# Altium PCB KUOZHAN.PCBDOC (part 17 of 21)
Units mm, origin at the board's own origin, x right, y up, seen from the top; angles counter-clockwise.
Board outline 165.51 x 116.38 mm, 2 copper layers (Top Layer, Bottom Layer); 171 components, 245 nets, 894 pads, 298 vias.
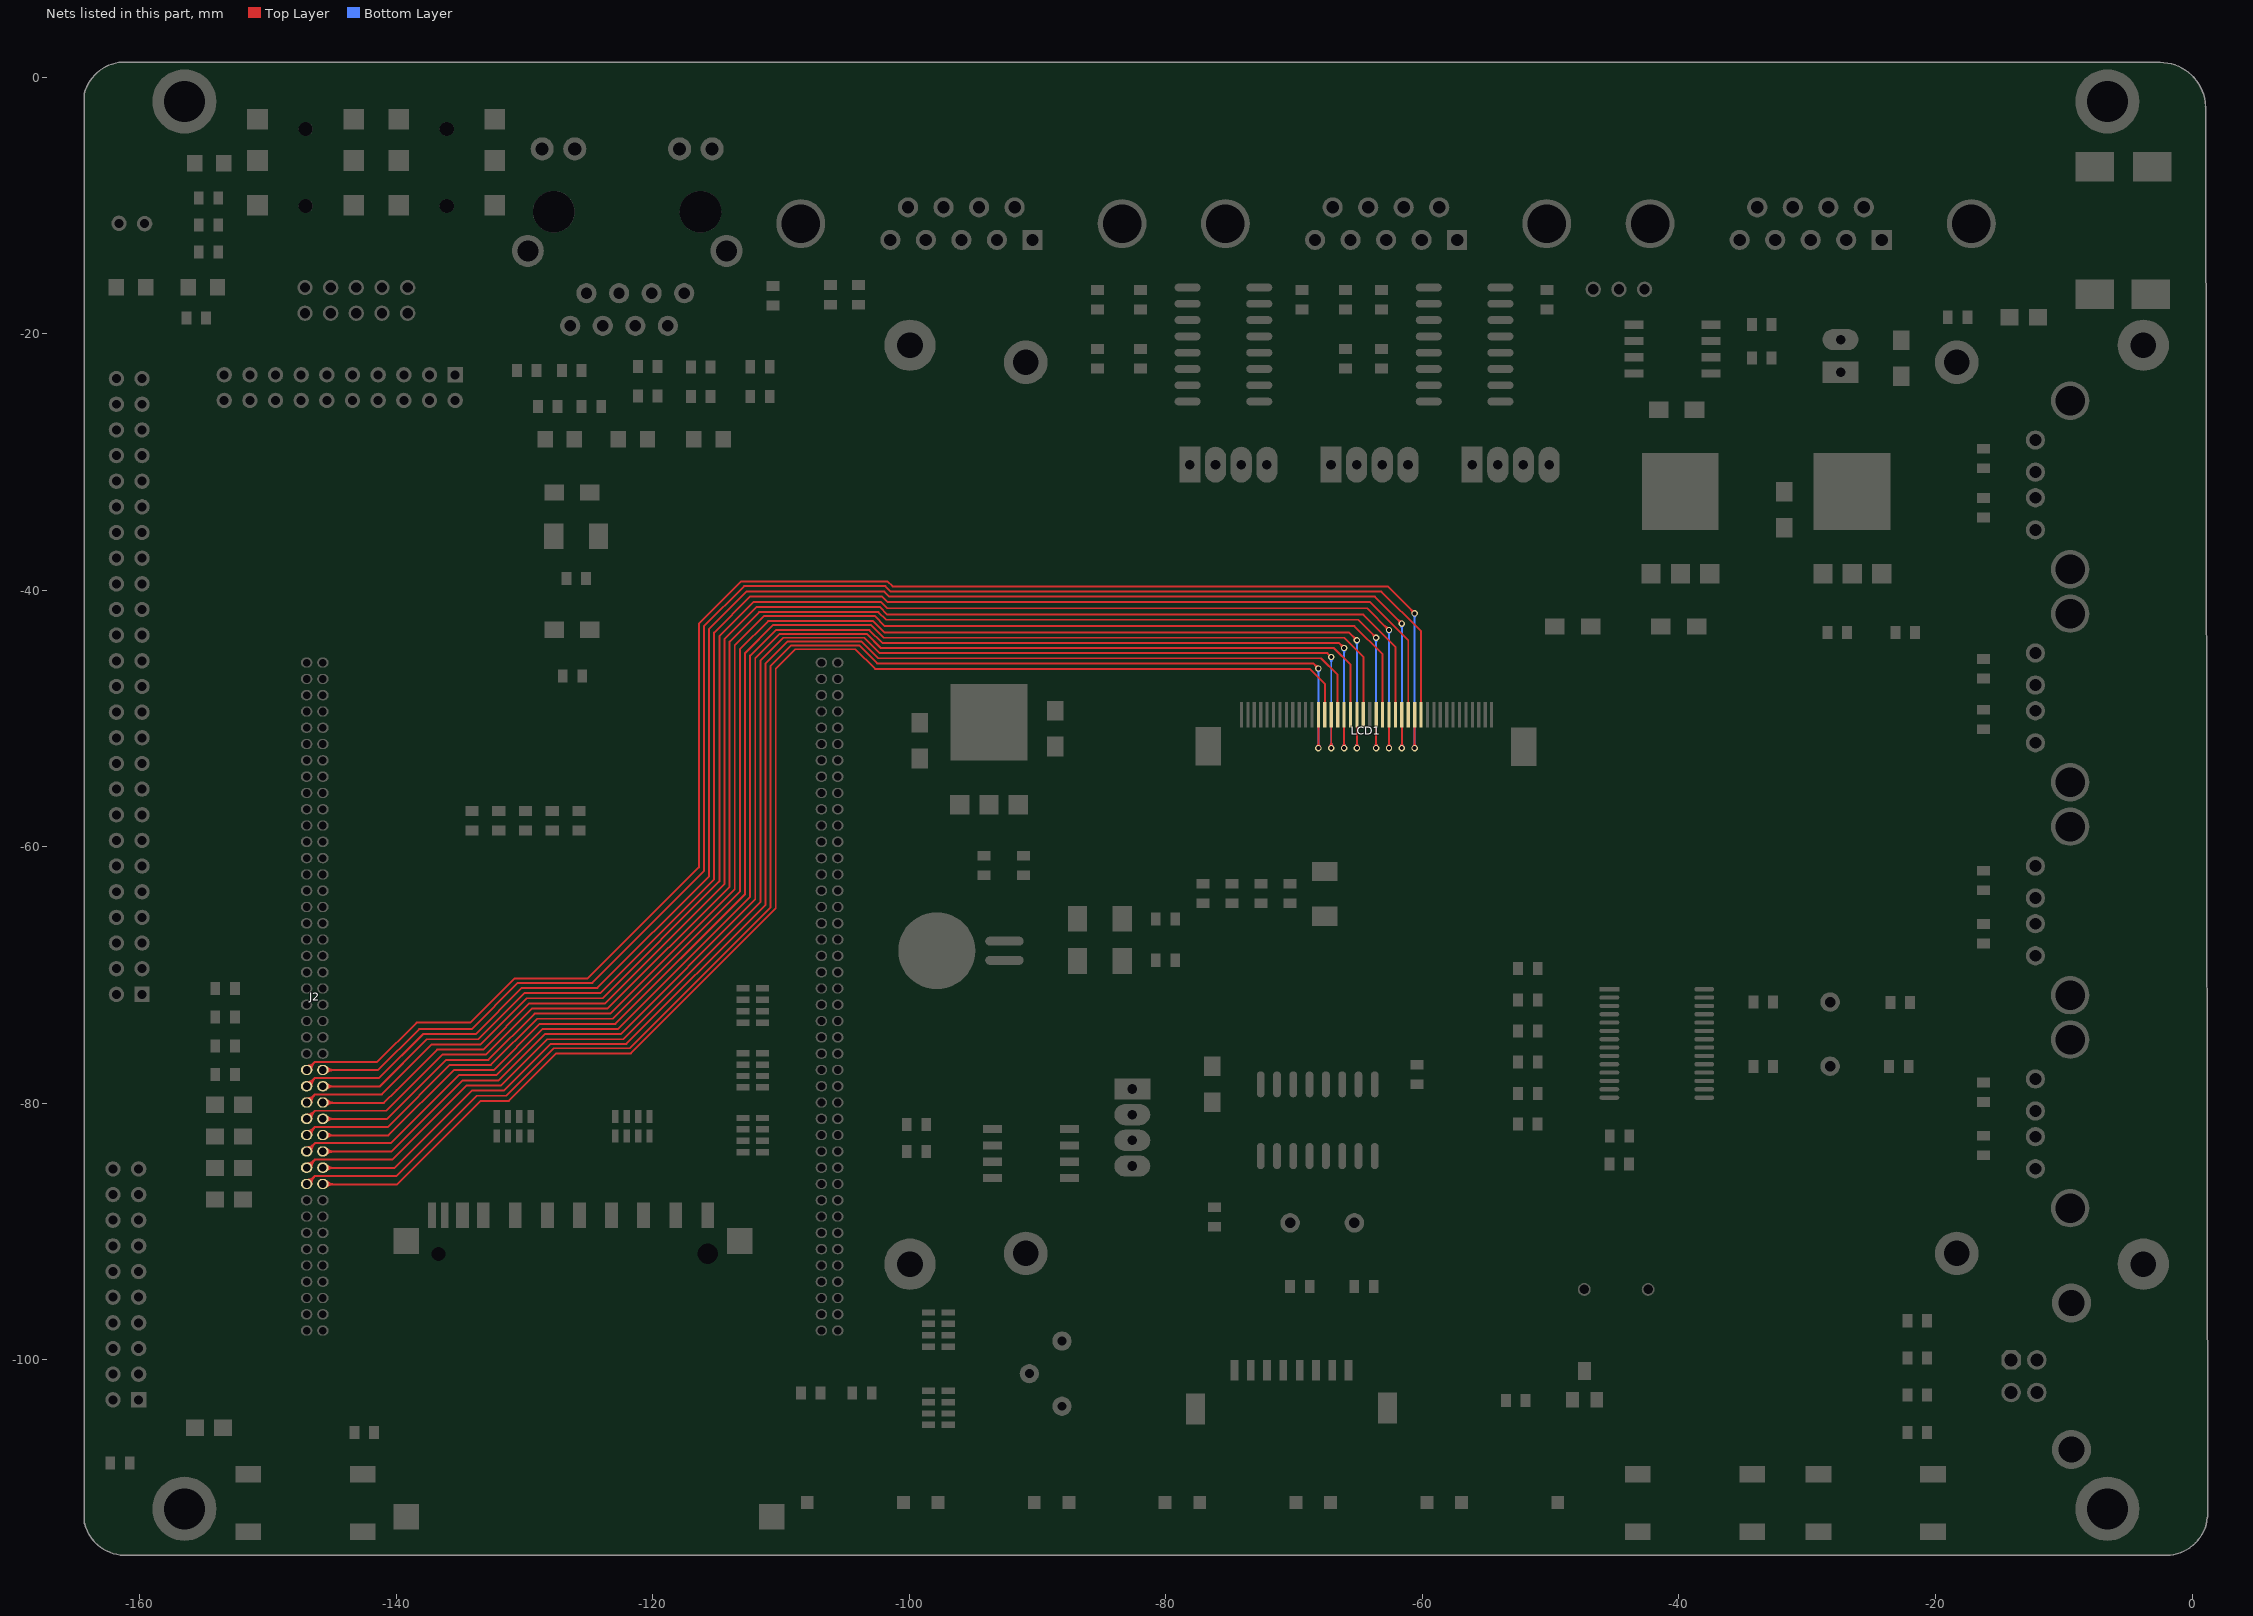
[diagram p17: the nets of this part, all layers, seen from the top]

## Via types
v1: diameter 0.5, hole 0.3, Top Layer to Bottom Layer, 272 vias
v2: diameter 0.6, hole 0.3, Top Layer to Bottom Layer, 24 vias
v3: diameter 0.9, hole 0.9, Top Layer to Bottom Layer, 2 vias

## Nets (pads, with @x,y where several pads share a name; then routed paths per layer and width w, separated by ;. In a path a pad name is that pad's centre, name@x,y a point inside that pad or via, vN(x,y) a via of type N, cw(c..) or ccw(c..) an arc to the next point about the centre after c; other vN are vias at no path point) (continued)
VD8: J2.52 LCD1.12 | length 129.3
  Top Layer w0.15: J2.52@-145.703,-77.41 -141.41,-77.41 -138.2,-74.2 -134.1,-74.2 -130.5,-70.6 -124.7,-70.6 -116,-61.9 -116,-42.8 -112.875,-39.675 -101.862,-39.675 -101.437,-40.1 -63.2,-40.1 -60.1,-43.2 LCD1.12@-60.1,-49.7 ; J2.52@-145.579,-77.534 cw(c-145.28,-77.833) J2.52@-145.28,-77.41 ; J2.52@-145.579,-77.534 cw(c-145.28,-77.833) J2.52@-145.28,-77.41 ; J2.52@-145.579,-77.534 cw(c-145.28,-77.833) J2.52@-145.28,-77.41 ; J2.52@-145.579,-77.287 ccw(c-145.28,-76.988) J2.52@-145.28,-77.41 ; J2.52@-145.579,-77.287 ccw(c-145.28,-76.988) J2.52@-145.28,-77.41 ; J2.52@-145.579,-77.287 ccw(c-145.28,-76.988) J2.52@-145.28,-77.41 ; J2.52@-145.473,-77.64 cw(c-144.918,-78.195) -144.918,-77.41 ; J2.52@-145.473,-77.64 cw(c-144.918,-78.195) -144.918,-77.41 ; J2.52@-145.473,-77.64 cw(c-144.918,-78.195) -144.918,-77.41 ; J2.52@-145.473,-77.181 ccw(c-144.918,-76.626) -144.918,-77.41 ; J2.52@-145.473,-77.181 ccw(c-144.918,-76.626) -144.918,-77.41 ; J2.52@-145.473,-77.181 ccw(c-144.918,-76.626) -144.918,-77.41 ; J2.52@-145.529,-77.266 ccw(c-145.18,-76.916) -145.18,-77.41 cw(c-145.18,-76.916) J2.52@-145.529,-77.266 ; J2.52@-145.423,-77.619 cw(c-144.919,-78.123) -144.919,-77.41 ccw(c-144.919,-78.123) J2.52@-145.423,-77.619 ; J2.52@-145.423,-77.16 ccw(c-144.817,-76.554) -144.817,-77.41 cw(c-144.817,-76.554) J2.52@-145.423,-77.16
VD9: J2.51 LCD1.13 | length 153
  Top Layer w0.15: J2.51@-146.973,-77.41 -146.348,-76.785 ; J2.51@-146.973,-77.389 -146.348,-76.764 ; v1@-60.725,-41.8 ccw(c-61.027,-41.8) -60.813,-41.587 ccw(c-60.6,-41.373) v1@-60.6,-41.675 ; v1@-60.688,-52.212 ccw(c-60.902,-51.998) -60.6,-51.998 ccw(c-60.298,-51.998) v1@-60.512,-52.212 ; v1(-60.6,-52.3) LCD1.13@-60.6,-49.7 ; v1(-60.6,-41.8) -62.7,-39.7 -101.3,-39.7 -101.7,-39.3 -113.1,-39.3 -116.4,-42.6 -116.4,-61.6 -125.056,-70.256 -130.756,-70.256 -134.2,-73.7 -138.4,-73.7 -141.464,-76.764 -146.348,-76.764 ; J2.51@-146.973,-77.235 ccw(c-146.973,-76.813) J2.51@-146.674,-77.112 ; J2.51@-146.973,-77.235 ccw(c-146.973,-76.813) J2.51@-146.674,-77.112 ; J2.51@-146.973,-77.235 ccw(c-146.973,-76.813) J2.51@-146.674,-77.112 ; J2.51@-146.973,-77.085 ccw(c-146.973,-76.301) -146.418,-76.856 ; J2.51@-146.973,-77.085 ccw(c-146.973,-76.301) -146.418,-76.856 ; J2.51@-146.973,-77.085 ccw(c-146.973,-76.301) -146.418,-76.856 ; J2.51@-146.923,-77.064 ccw(c-146.923,-76.35) -146.417,-76.855 ; J2.51@-146.923,-77.064 ccw(c-146.923,-76.4) -146.453,-76.87 cw(c-146.923,-76.4) J2.51@-146.923,-77.064 ; J2.51@-146.923,-77.064 ccw(c-146.923,-76.35) -146.417,-76.855 ; J2.51@-146.798,-77.41 cw(c-146.375,-77.41) J2.51@-146.674,-77.112 ; J2.51@-146.798,-77.41 cw(c-146.375,-77.41) J2.51@-146.674,-77.112 ; J2.51@-146.798,-77.41 cw(c-146.375,-77.41) J2.51@-146.674,-77.112 ; J2.51@-146.648,-77.41 cw(c-145.863,-77.41) -146.418,-76.856 ; J2.51@-146.648,-77.41 cw(c-145.863,-77.41) -146.418,-76.856 ; J2.51@-146.648,-77.41 cw(c-145.863,-77.41) -146.418,-76.856 ; -146.348,-76.785 ccw(c-145.744,-77.389) -146.598,-77.389 cw(c-145.744,-77.389) -146.348,-76.785 ; -146.348,-76.764 ccw(c-145.744,-77.368) -146.598,-77.384 cw(c-145.744,-77.368) -146.348,-76.764 ; -60.899,-41.501 cw(c-61.197,-41.8) v1@-60.775,-41.8 ; -60.899,-41.501 ccw(c-60.6,-41.203) v1@-60.6,-41.625 ; -60.899,-41.501 cw(c-61.197,-41.8) v1@-60.775,-41.8 ; -60.899,-41.501 ccw(c-60.6,-41.203) v1@-60.6,-41.625 ; -60.899,-41.501 cw(c-61.197,-41.8) v1@-60.775,-41.8 ; -60.899,-41.501 ccw(c-60.6,-41.203) v1@-60.6,-41.625 ; -60.899,-41.501 ccw(c-60.6,-41.203) v1@-60.6,-41.625 ; -60.899,-41.501 cw(c-61.197,-41.8) v1@-60.775,-41.8 ; v1@-60.724,-52.176 ccw(c-61.022,-51.878) -60.6,-51.878 ; v1@-60.724,-52.176 ccw(c-61.022,-51.878) -60.6,-51.878 ; v1@-60.724,-52.176 ccw(c-61.022,-51.878) -60.6,-51.878 ; v1@-60.724,-52.176 ccw(c-61.022,-51.878) -60.6,-51.878 ; -60.6,-51.878 ccw(c-60.178,-51.878) v1@-60.476,-52.176 ; -60.6,-51.878 ccw(c-60.178,-51.878) v1@-60.476,-52.176 ; -60.6,-51.878 ccw(c-60.178,-51.878) v1@-60.476,-52.176 ; -60.6,-51.878 ccw(c-60.178,-51.878) v1@-60.476,-52.176 ; J2.51@-146.748,-77.389 cw(c-146.256,-77.389) -146.604,-77.041 ccw(c-146.256,-77.389) J2.51@-146.748,-77.389 ; J2.51@-146.748,-77.386 cw(c-146.235,-77.377) -146.598,-77.014 ccw(c-146.235,-77.377) J2.51@-146.748,-77.386
  Bottom Layer w0.15: v1@-60.688,-52.212 ccw(c-60.902,-51.998) -60.6,-51.998 ccw(c-60.298,-51.998) v1@-60.512,-52.212 ; v1@-60.688,-41.888 cw(c-60.902,-42.102) -60.6,-42.102 cw(c-60.298,-42.102) v1@-60.512,-41.888 ; v1(-60.6,-52.3) v1(-60.6,-41.8) ; v1@-60.724,-52.176 ccw(c-61.022,-51.878) -60.6,-51.878 ; v1@-60.724,-52.176 ccw(c-61.022,-51.878) -60.6,-51.878 ; v1@-60.724,-52.176 ccw(c-61.022,-51.878) -60.6,-51.878 ; v1@-60.724,-52.176 ccw(c-61.022,-51.878) -60.6,-51.878 ; v1@-60.724,-41.924 cw(c-61.022,-42.222) -60.6,-42.222 ; v1@-60.724,-41.924 cw(c-61.022,-42.222) -60.6,-42.222 ; v1@-60.724,-41.924 cw(c-61.022,-42.222) -60.6,-42.222 ; v1@-60.724,-41.924 cw(c-61.022,-42.222) -60.6,-42.222 ; -60.6,-51.878 ccw(c-60.178,-51.878) v1@-60.476,-52.176 ; -60.6,-51.878 ccw(c-60.178,-51.878) v1@-60.476,-52.176 ; -60.6,-51.878 ccw(c-60.178,-51.878) v1@-60.476,-52.176 ; -60.6,-51.878 ccw(c-60.178,-51.878) v1@-60.476,-52.176 ; -60.6,-42.222 cw(c-60.178,-42.222) v1@-60.476,-41.924 ; -60.6,-42.222 cw(c-60.178,-42.222) v1@-60.476,-41.924 ; -60.6,-42.222 cw(c-60.178,-42.222) v1@-60.476,-41.924 ; -60.6,-42.222 cw(c-60.178,-42.222) v1@-60.476,-41.924
VD10: J2.54 LCD1.14 | length 127.8
  Top Layer w0.15: J2.54@-145.703,-78.681 -141.281,-78.681 -137.6,-75 -133.6,-75 -130,-71.4 -124.076,-71.4 -115.2,-62.524 -115.2,-43.3 -112.375,-40.475 -102.125,-40.475 -101.7,-40.9 -64.1,-40.9 -61.1,-43.9 LCD1.14@-61.1,-49.7 ; J2.54@-145.579,-78.805 cw(c-145.28,-79.104) J2.54@-145.28,-78.681 ; J2.54@-145.579,-78.805 cw(c-145.28,-79.104) J2.54@-145.28,-78.681 ; J2.54@-145.579,-78.805 cw(c-145.28,-79.104) J2.54@-145.28,-78.681 ; J2.54@-145.579,-78.557 ccw(c-145.28,-78.259) J2.54@-145.28,-78.681 ; J2.54@-145.579,-78.557 ccw(c-145.28,-78.259) J2.54@-145.28,-78.681 ; J2.54@-145.579,-78.557 ccw(c-145.28,-78.259) J2.54@-145.28,-78.681 ; J2.54@-145.473,-78.911 cw(c-144.918,-79.466) -144.918,-78.681 ; J2.54@-145.473,-78.911 cw(c-144.918,-79.466) -144.918,-78.681 ; J2.54@-145.473,-78.911 cw(c-144.918,-79.466) -144.918,-78.681 ; J2.54@-145.473,-78.451 ccw(c-144.918,-77.897) -144.918,-78.681 ; J2.54@-145.473,-78.451 ccw(c-144.918,-77.897) -144.918,-78.681 ; J2.54@-145.473,-78.451 ccw(c-144.918,-77.897) -144.918,-78.681 ; J2.54@-145.529,-78.536 ccw(c-145.177,-78.184) -145.177,-78.681 cw(c-145.177,-78.184) J2.54@-145.529,-78.536 ; J2.54@-145.423,-78.889 cw(c-144.921,-79.391) -144.921,-78.681 ccw(c-144.921,-79.391) J2.54@-145.423,-78.889 ; J2.54@-145.423,-78.43 ccw(c-144.815,-77.822) -144.815,-78.681 cw(c-144.815,-77.822) J2.54@-145.423,-78.43
VD11: J2.53 LCD1.15 | length 151.7
  Top Layer w0.15: J2.53@-146.973,-78.681 -146.327,-78.035 ; J2.53@-146.973,-78.659 -146.328,-78.014 -141.314,-78.014 -137.9,-74.6 -133.8,-74.6 -130.2,-71 -124.3,-71 -115.6,-62.3 -115.6,-43 -112.7,-40.1 -101.937,-40.1 -101.537,-40.5 -63.7,-40.5 v1(-61.6,-42.6) ; v1@-61.725,-42.6 ccw(c-62.027,-42.6) -61.813,-42.387 ccw(c-61.6,-42.173) v1@-61.6,-42.475 ; v1@-61.688,-52.212 ccw(c-61.902,-51.998) -61.6,-51.998 ccw(c-61.298,-51.998) v1@-61.512,-52.212 ; v1(-61.6,-52.3) LCD1.15@-61.6,-49.7 ; J2.53@-146.973,-78.506 ccw(c-146.973,-78.084) J2.53@-146.674,-78.382 ; J2.53@-146.973,-78.506 ccw(c-146.973,-78.084) J2.53@-146.674,-78.382 ; J2.53@-146.973,-78.506 ccw(c-146.973,-78.084) J2.53@-146.674,-78.382 ; J2.53@-146.973,-78.356 ccw(c-146.973,-77.572) -146.418,-78.126 ; J2.53@-146.973,-78.356 ccw(c-146.973,-77.572) -146.418,-78.126 ; J2.53@-146.973,-78.356 ccw(c-146.973,-77.572) -146.418,-78.126 ; J2.53@-146.923,-78.334 ccw(c-146.923,-77.618) -146.416,-78.124 cw(c-146.923,-77.618) J2.53@-146.923,-78.334 ; J2.53@-146.923,-78.334 ccw(c-146.923,-77.67) -146.453,-78.14 cw(c-146.923,-77.67) J2.53@-146.923,-78.334 ; J2.53@-146.798,-78.681 cw(c-146.375,-78.681) J2.53@-146.674,-78.382 ; J2.53@-146.798,-78.681 cw(c-146.375,-78.681) J2.53@-146.674,-78.382 ; J2.53@-146.798,-78.681 cw(c-146.375,-78.681) J2.53@-146.674,-78.382 ; J2.53@-146.748,-78.659 cw(c-146.258,-78.659) -146.604,-78.313 ccw(c-146.258,-78.659) J2.53@-146.748,-78.659 ; J2.53@-146.748,-78.659 cw(c-146.205,-78.659) -146.589,-78.275 ccw(c-146.205,-78.659) J2.53@-146.748,-78.659 ; J2.53@-146.648,-78.681 cw(c-145.863,-78.681) -146.418,-78.126 ; J2.53@-146.648,-78.681 cw(c-145.863,-78.681) -146.418,-78.126 ; J2.53@-146.648,-78.681 cw(c-145.863,-78.681) -146.418,-78.126 ; J2.53@-146.598,-78.659 cw(c-145.745,-78.659) -146.348,-78.057 ccw(c-145.745,-78.659) J2.53@-146.598,-78.659 ; J2.53@-146.598,-78.659 cw(c-145.692,-78.659) -146.333,-78.019 ccw(c-145.692,-78.659) J2.53@-146.598,-78.659 ; -61.899,-42.301 cw(c-62.197,-42.6) v1@-61.775,-42.6 ; -61.899,-42.301 ccw(c-61.6,-42.003) v1@-61.6,-42.425 ; -61.899,-42.301 cw(c-62.197,-42.6) v1@-61.775,-42.6 ; -61.899,-42.301 ccw(c-61.6,-42.003) v1@-61.6,-42.425 ; -61.899,-42.301 cw(c-62.197,-42.6) v1@-61.775,-42.6 ; -61.899,-42.301 ccw(c-61.6,-42.003) v1@-61.6,-42.425 ; -61.899,-42.301 ccw(c-61.6,-42.003) v1@-61.6,-42.425 ; -61.899,-42.301 cw(c-62.197,-42.6) v1@-61.775,-42.6 ; v1@-61.724,-52.176 ccw(c-62.022,-51.878) -61.6,-51.878 ; v1@-61.724,-52.176 ccw(c-62.022,-51.878) -61.6,-51.878 ; v1@-61.724,-52.176 ccw(c-62.022,-51.878) -61.6,-51.878 ; v1@-61.724,-52.176 ccw(c-62.022,-51.878) -61.6,-51.878 ; -61.6,-51.878 ccw(c-61.178,-51.878) v1@-61.476,-52.176 ; -61.6,-51.878 ccw(c-61.178,-51.878) v1@-61.476,-52.176 ; -61.6,-51.878 ccw(c-61.178,-51.878) v1@-61.476,-52.176 ; -61.6,-51.878 ccw(c-61.178,-51.878) v1@-61.476,-52.176
  Bottom Layer w0.15: v1@-61.688,-52.212 ccw(c-61.902,-51.998) -61.6,-51.998 ccw(c-61.298,-51.998) v1@-61.512,-52.212 ; v1@-61.688,-42.688 cw(c-61.902,-42.902) -61.6,-42.902 cw(c-61.298,-42.902) v1@-61.512,-42.688 ; v1(-61.6,-52.3) v1(-61.6,-42.6) ; v1@-61.724,-52.176 ccw(c-62.022,-51.878) -61.6,-51.878 ; v1@-61.724,-52.176 ccw(c-62.022,-51.878) -61.6,-51.878 ; v1@-61.724,-52.176 ccw(c-62.022,-51.878) -61.6,-51.878 ; v1@-61.724,-52.176 ccw(c-62.022,-51.878) -61.6,-51.878 ; v1@-61.724,-42.724 cw(c-62.022,-43.022) -61.6,-43.022 ; v1@-61.724,-42.724 cw(c-62.022,-43.022) -61.6,-43.022 ; v1@-61.724,-42.724 cw(c-62.022,-43.022) -61.6,-43.022 ; v1@-61.724,-42.724 cw(c-62.022,-43.022) -61.6,-43.022 ; -61.6,-51.878 ccw(c-61.178,-51.878) v1@-61.476,-52.176 ; -61.6,-51.878 ccw(c-61.178,-51.878) v1@-61.476,-52.176 ; -61.6,-51.878 ccw(c-61.178,-51.878) v1@-61.476,-52.176 ; -61.6,-51.878 ccw(c-61.178,-51.878) v1@-61.476,-52.176 ; -61.6,-43.022 cw(c-61.178,-43.022) v1@-61.476,-42.724 ; -61.6,-43.022 cw(c-61.178,-43.022) v1@-61.476,-42.724 ; -61.6,-43.022 cw(c-61.178,-43.022) v1@-61.476,-42.724 ; -61.6,-43.022 cw(c-61.178,-43.022) v1@-61.476,-42.724
VD12: J2.56 LCD1.16 | length 126.3
  Top Layer w0.15: J2.56@-145.703,-79.952 -140.952,-79.952 -139.958,-78.958 -136.8,-75.8 -133.2,-75.8 -129.6,-72.2 -123.7,-72.2 -114.4,-62.9 -114.4,-43.8 -111.9,-41.3 -102.3,-41.3 -101.7,-41.9 -64.6,-41.9 -62.1,-44.4 LCD1.16@-62.1,-49.7 ; J2.56@-145.579,-80.076 cw(c-145.28,-80.375) J2.56@-145.28,-79.952 ; J2.56@-145.579,-80.076 cw(c-145.28,-80.375) J2.56@-145.28,-79.952 ; J2.56@-145.579,-80.076 cw(c-145.28,-80.375) J2.56@-145.28,-79.952 ; J2.56@-145.579,-79.828 ccw(c-145.28,-79.53) J2.56@-145.28,-79.952 ; J2.56@-145.579,-79.828 ccw(c-145.28,-79.53) J2.56@-145.28,-79.952 ; J2.56@-145.579,-79.828 ccw(c-145.28,-79.53) J2.56@-145.28,-79.952 ; J2.56@-145.473,-80.182 cw(c-144.918,-80.737) -144.918,-79.952 ; J2.56@-145.473,-80.182 cw(c-144.918,-80.737) -144.918,-79.952 ; J2.56@-145.473,-80.182 cw(c-144.918,-80.737) -144.918,-79.952 ; J2.56@-145.473,-79.722 ccw(c-144.918,-79.167) -144.918,-79.952 ; J2.56@-145.473,-79.722 ccw(c-144.918,-79.167) -144.918,-79.952 ; J2.56@-145.473,-79.722 ccw(c-144.918,-79.167) -144.918,-79.952 ; J2.56@-145.529,-79.806 ccw(c-145.175,-79.452) -145.175,-79.952 cw(c-145.175,-79.452) J2.56@-145.529,-79.806 ; J2.56@-145.423,-80.159 cw(c-144.923,-80.659) -144.923,-79.952 ccw(c-144.923,-80.659) J2.56@-145.423,-80.159 ; J2.56@-145.423,-79.7 ccw(c-144.813,-79.09) -144.813,-79.952 cw(c-144.813,-79.09) J2.56@-145.423,-79.7
VD13: J2.55 LCD1.17 | length 150
  Top Layer w0.15: J2.55@-146.973,-79.952 -146.327,-79.306 ; J2.55@-146.973,-79.929 -146.343,-79.3 ; v1@-62.725,-43.1 ccw(c-63.027,-43.1) -62.813,-42.887 ccw(c-62.6,-42.673) v1@-62.6,-42.975 ; v1@-62.688,-52.212 ccw(c-62.902,-51.998) -62.6,-51.998 ccw(c-62.298,-51.998) v1@-62.512,-52.212 ; v1(-62.6,-52.3) LCD1.17@-62.6,-49.7 ; v1(-62.6,-43.1) -64.3,-41.4 -101.7,-41.4 -102.2,-40.9 -112.1,-40.9 -114.8,-43.6 -114.8,-62.7 -123.9,-71.8 -129.8,-71.8 -133.4,-75.4 -137.2,-75.4 -141.1,-79.3 -146.343,-79.3 ; J2.55@-146.973,-79.777 ccw(c-146.973,-79.355) J2.55@-146.674,-79.653 ; J2.55@-146.973,-79.777 ccw(c-146.973,-79.355) J2.55@-146.674,-79.653 ; J2.55@-146.973,-79.777 ccw(c-146.973,-79.355) J2.55@-146.674,-79.653 ; J2.55@-146.973,-79.627 ccw(c-146.973,-78.842) -146.418,-79.397 ; J2.55@-146.973,-79.627 ccw(c-146.973,-78.842) -146.418,-79.397 ; J2.55@-146.973,-79.627 ccw(c-146.973,-78.842) -146.418,-79.397 ; J2.55@-146.923,-79.604 ccw(c-146.923,-78.885) -146.414,-79.394 cw(c-146.923,-78.885) J2.55@-146.923,-79.604 ; J2.55@-146.923,-79.604 ccw(c-146.923,-78.94) -146.453,-79.41 cw(c-146.923,-78.94) J2.55@-146.923,-79.604 ; J2.55@-146.798,-79.952 cw(c-146.375,-79.952) J2.55@-146.674,-79.653 ; J2.55@-146.798,-79.952 cw(c-146.375,-79.952) J2.55@-146.674,-79.653 ; J2.55@-146.798,-79.952 cw(c-146.375,-79.952) J2.55@-146.674,-79.653 ; J2.55@-146.648,-79.952 cw(c-145.863,-79.952) -146.418,-79.397 ; J2.55@-146.648,-79.952 cw(c-145.863,-79.952) -146.418,-79.397 ; J2.55@-146.648,-79.952 cw(c-145.863,-79.952) -146.418,-79.397 ; -146.344,-79.3 ccw(c-145.729,-79.914) -146.598,-79.925 cw(c-145.729,-79.914) -146.344,-79.3 ; -62.899,-42.801 cw(c-63.197,-43.1) v1@-62.775,-43.1 ; -62.899,-42.801 ccw(c-62.6,-42.503) v1@-62.6,-42.925 ; -62.899,-42.801 cw(c-63.197,-43.1) v1@-62.775,-43.1 ; -62.899,-42.801 ccw(c-62.6,-42.503) v1@-62.6,-42.925 ; -62.899,-42.801 cw(c-63.197,-43.1) v1@-62.775,-43.1 ; -62.899,-42.801 ccw(c-62.6,-42.503) v1@-62.6,-42.925 ; -62.899,-42.801 ccw(c-62.6,-42.503) v1@-62.6,-42.925 ; -62.899,-42.801 cw(c-63.197,-43.1) v1@-62.775,-43.1 ; v1@-62.724,-52.176 ccw(c-63.022,-51.878) -62.6,-51.878 ; v1@-62.724,-52.176 ccw(c-63.022,-51.878) -62.6,-51.878 ; v1@-62.724,-52.176 ccw(c-63.022,-51.878) -62.6,-51.878 ; v1@-62.724,-52.176 ccw(c-63.022,-51.878) -62.6,-51.878 ; -62.6,-51.878 ccw(c-62.178,-51.878) v1@-62.476,-52.176 ; -62.6,-51.878 ccw(c-62.178,-51.878) v1@-62.476,-52.176 ; -62.6,-51.878 ccw(c-62.178,-51.878) v1@-62.476,-52.176 ; -62.6,-51.878 ccw(c-62.178,-51.878) v1@-62.476,-52.176 ; J2.55@-146.748,-79.929 cw(c-146.26,-79.929) -146.605,-79.584 ccw(c-146.26,-79.929) J2.55@-146.748,-79.929 ; J2.55@-146.748,-79.927 cw(c-146.226,-79.92) -146.595,-79.552 ccw(c-146.226,-79.92) J2.55@-146.748,-79.927 ; J2.55@-146.598,-79.929 cw(c-145.747,-79.929) -146.349,-79.328 ccw(c-145.747,-79.929) J2.55@-146.598,-79.929
  Bottom Layer w0.15: v1@-62.688,-52.212 ccw(c-62.902,-51.998) -62.6,-51.998 ccw(c-62.298,-51.998) v1@-62.512,-52.212 ; v1@-62.688,-43.188 cw(c-62.902,-43.402) -62.6,-43.402 cw(c-62.298,-43.402) v1@-62.512,-43.188 ; v1(-62.6,-52.3) v1(-62.6,-43.1) ; v1@-62.724,-52.176 ccw(c-63.022,-51.878) -62.6,-51.878 ; v1@-62.724,-52.176 ccw(c-63.022,-51.878) -62.6,-51.878 ; v1@-62.724,-52.176 ccw(c-63.022,-51.878) -62.6,-51.878 ; v1@-62.724,-52.176 ccw(c-63.022,-51.878) -62.6,-51.878 ; v1@-62.724,-43.224 cw(c-63.022,-43.522) -62.6,-43.522 ; v1@-62.724,-43.224 cw(c-63.022,-43.522) -62.6,-43.522 ; v1@-62.724,-43.224 cw(c-63.022,-43.522) -62.6,-43.522 ; v1@-62.724,-43.224 cw(c-63.022,-43.522) -62.6,-43.522 ; -62.6,-51.878 ccw(c-62.178,-51.878) v1@-62.476,-52.176 ; -62.6,-51.878 ccw(c-62.178,-51.878) v1@-62.476,-52.176 ; -62.6,-51.878 ccw(c-62.178,-51.878) v1@-62.476,-52.176 ; -62.6,-51.878 ccw(c-62.178,-51.878) v1@-62.476,-52.176 ; -62.6,-43.522 cw(c-62.178,-43.522) v1@-62.476,-43.224 ; -62.6,-43.522 cw(c-62.178,-43.522) v1@-62.476,-43.224 ; -62.6,-43.522 cw(c-62.178,-43.522) v1@-62.476,-43.224 ; -62.6,-43.522 cw(c-62.178,-43.522) v1@-62.476,-43.224
VD14: J2.58 LCD1.18 | length 124.9
  Top Layer w0.15: J2.58@-145.703,-81.223 -140.723,-81.223 -136.1,-76.6 -132.8,-76.6 -129.2,-73 -123.3,-73 -113.6,-63.3 -113.6,-44.3 -111.3,-42 -102.7,-42 -101.9,-42.8 -65.3,-42.8 -63.1,-45 LCD1.18@-63.1,-49.7 ; J2.58@-145.579,-81.347 cw(c-145.28,-81.645) J2.58@-145.28,-81.223 ; J2.58@-145.579,-81.347 cw(c-145.28,-81.645) J2.58@-145.28,-81.223 ; J2.58@-145.579,-81.347 cw(c-145.28,-81.645) J2.58@-145.28,-81.223 ; J2.58@-145.579,-81.099 ccw(c-145.28,-80.801) J2.58@-145.28,-81.223 ; J2.58@-145.579,-81.099 ccw(c-145.28,-80.801) J2.58@-145.28,-81.223 ; J2.58@-145.579,-81.099 ccw(c-145.28,-80.801) J2.58@-145.28,-81.223 ; J2.58@-145.473,-81.453 cw(c-144.918,-82.008) -144.918,-81.223 ; J2.58@-145.473,-81.453 cw(c-144.918,-82.008) -144.918,-81.223 ; J2.58@-145.473,-81.453 cw(c-144.918,-82.008) -144.918,-81.223 ; J2.58@-145.473,-80.993 ccw(c-144.918,-80.438) -144.918,-81.223 ; J2.58@-145.473,-80.993 ccw(c-144.918,-80.438) -144.918,-81.223 ; J2.58@-145.473,-80.993 ccw(c-144.918,-80.438) -144.918,-81.223 ; J2.58@-145.529,-81.076 ccw(c-145.173,-80.72) -145.173,-81.223 cw(c-145.173,-80.72) J2.58@-145.529,-81.076 ; J2.58@-145.423,-81.429 cw(c-144.925,-81.927) -144.925,-81.223 ccw(c-144.925,-81.927) J2.58@-145.423,-81.429 ; J2.58@-145.423,-80.97 ccw(c-144.811,-80.358) -144.811,-81.223 cw(c-144.811,-80.358) J2.58@-145.423,-80.97
VD15: J2.57 LCD1.19 | length 148.2
  Top Layer w0.15: J2.57@-146.973,-81.223 -146.953,-81.223 -146.328,-80.598 ; J2.57@-146.973,-81.199 -146.348,-80.574 ; v1@-63.725,-43.7 ccw(c-64.027,-43.7) -63.813,-43.487 ccw(c-63.6,-43.273) v1@-63.6,-43.575 ; v1@-63.688,-52.212 ccw(c-63.902,-51.998) -63.6,-51.998 ccw(c-63.298,-51.998) v1@-63.512,-52.212 ; v1(-63.6,-52.3) LCD1.19@-63.6,-49.7 ; v1(-63.6,-43.7) -65,-42.3 -101.8,-42.3 -102.4,-41.7 -111.7,-41.7 -114,-44 -114,-63.1 -123.5,-72.6 -129.4,-72.6 -133,-76.2 -136.4,-76.2 -140.774,-80.574 -146.348,-80.574 ; J2.57@-146.973,-81.048 ccw(c-146.973,-80.577) -146.64,-80.91 ; J2.57@-146.973,-81.048 ccw(c-146.973,-80.577) -146.64,-80.91 ; J2.57@-146.973,-81.048 ccw(c-146.973,-80.577) -146.64,-80.91 ; J2.57@-146.973,-80.898 ccw(c-146.973,-80.065) -146.384,-80.654 ; J2.57@-146.973,-80.898 ccw(c-146.973,-80.065) -146.384,-80.654 ; J2.57@-146.973,-80.898 ccw(c-146.973,-80.065) -146.384,-80.654 ; J2.57@-146.923,-80.874 ccw(c-146.923,-80.105) -146.379,-80.649 cw(c-146.923,-80.105) J2.57@-146.923,-80.874 ; J2.57@-146.923,-80.874 ccw(c-146.923,-80.21) -146.453,-80.68 cw(c-146.923,-80.21) J2.57@-146.923,-80.874 ; J2.57@-146.648,-81.223 cw(c-145.911,-81.223) -146.432,-80.702 ; J2.57@-146.648,-81.223 cw(c-145.911,-81.223) -146.432,-80.702 ; J2.57@-146.648,-81.223 cw(c-145.911,-81.223) -146.432,-80.702 ; -146.348,-80.574 ccw(c-145.744,-81.178) -146.598,-81.194 cw(c-145.744,-81.178) -146.348,-80.574 ; -63.899,-43.401 cw(c-64.197,-43.7) v1@-63.775,-43.7 ; -63.899,-43.401 ccw(c-63.6,-43.103) v1@-63.6,-43.525 ; -63.899,-43.401 cw(c-64.197,-43.7) v1@-63.775,-43.7 ; -63.899,-43.401 ccw(c-63.6,-43.103) v1@-63.6,-43.525 ; -63.899,-43.401 cw(c-64.197,-43.7) v1@-63.775,-43.7 ; -63.899,-43.401 ccw(c-63.6,-43.103) v1@-63.6,-43.525 ; -63.899,-43.401 ccw(c-63.6,-43.103) v1@-63.6,-43.525 ; -63.899,-43.401 cw(c-64.197,-43.7) v1@-63.775,-43.7 ; v1@-63.724,-52.176 ccw(c-64.022,-51.878) -63.6,-51.878 ; v1@-63.724,-52.176 ccw(c-64.022,-51.878) -63.6,-51.878 ; v1@-63.724,-52.176 ccw(c-64.022,-51.878) -63.6,-51.878 ; v1@-63.724,-52.176 ccw(c-64.022,-51.878) -63.6,-51.878 ; -63.6,-51.878 ccw(c-63.178,-51.878) v1@-63.476,-52.176 ; -63.6,-51.878 ccw(c-63.178,-51.878) v1@-63.476,-52.176 ; -63.6,-51.878 ccw(c-63.178,-51.878) v1@-63.476,-52.176 ; -63.6,-51.878 ccw(c-63.178,-51.878) v1@-63.476,-52.176 ; J2.57@-146.923,-81.024 ccw(c-146.923,-80.617) -146.635,-80.905 cw(c-146.923,-80.617) J2.57@-146.923,-81.024 ; J2.57@-146.748,-81.199 cw(c-146.31,-81.199) -146.62,-80.89 ccw(c-146.31,-81.199) J2.57@-146.748,-81.199 ; J2.57@-146.748,-81.196 cw(c-146.235,-81.187) -146.598,-80.824 ccw(c-146.235,-81.187) J2.57@-146.748,-81.196 ; J2.57@-146.598,-81.199 cw(c-145.798,-81.199) -146.364,-80.634 ccw(c-145.798,-81.199) J2.57@-146.598,-81.199
  Bottom Layer w0.15: v1@-63.688,-52.212 ccw(c-63.902,-51.998) -63.6,-51.998 ccw(c-63.298,-51.998) v1@-63.512,-52.212 ; v1@-63.688,-43.788 cw(c-63.902,-44.002) -63.6,-44.002 cw(c-63.298,-44.002) v1@-63.512,-43.788 ; v1(-63.6,-52.3) v1(-63.6,-43.7) ; v1@-63.724,-52.176 ccw(c-64.022,-51.878) -63.6,-51.878 ; v1@-63.724,-52.176 ccw(c-64.022,-51.878) -63.6,-51.878 ; v1@-63.724,-52.176 ccw(c-64.022,-51.878) -63.6,-51.878 ; v1@-63.724,-52.176 ccw(c-64.022,-51.878) -63.6,-51.878 ; v1@-63.724,-43.824 cw(c-64.022,-44.122) -63.6,-44.122 ; v1@-63.724,-43.824 cw(c-64.022,-44.122) -63.6,-44.122 ; v1@-63.724,-43.824 cw(c-64.022,-44.122) -63.6,-44.122 ; v1@-63.724,-43.824 cw(c-64.022,-44.122) -63.6,-44.122 ; -63.6,-51.878 ccw(c-63.178,-51.878) v1@-63.476,-52.176 ; -63.6,-51.878 ccw(c-63.178,-51.878) v1@-63.476,-52.176 ; -63.6,-51.878 ccw(c-63.178,-51.878) v1@-63.476,-52.176 ; -63.6,-51.878 ccw(c-63.178,-51.878) v1@-63.476,-52.176 ; -63.6,-44.122 cw(c-63.178,-44.122) v1@-63.476,-43.824 ; -63.6,-44.122 cw(c-63.178,-44.122) v1@-63.476,-43.824 ; -63.6,-44.122 cw(c-63.178,-44.122) v1@-63.476,-43.824 ; -63.6,-44.122 cw(c-63.178,-44.122) v1@-63.476,-43.824
VD16: J2.60 LCD1.21 | length 123.1
  Top Layer w0.15: J2.60@-145.703,-82.494 -140.803,-82.494 -140.594,-82.494 -135.5,-77.4 -132.4,-77.4 -128.8,-73.8 -122.9,-73.8 -112.8,-63.7 -112.8,-44.9 -110.6,-42.7 -103,-42.7 -102,-43.7 -66.1,-43.7 -64.6,-45.2 LCD1.21@-64.6,-49.7 ; J2.60@-145.579,-82.618 cw(c-145.28,-82.916) J2.60@-145.28,-82.494 ; J2.60@-145.579,-82.618 cw(c-145.28,-82.916) J2.60@-145.28,-82.494 ; J2.60@-145.579,-82.618 cw(c-145.28,-82.916) J2.60@-145.28,-82.494 ; J2.60@-145.579,-82.37 ccw(c-145.28,-82.071) J2.60@-145.28,-82.494 ; J2.60@-145.579,-82.37 ccw(c-145.28,-82.071) J2.60@-145.28,-82.494 ; J2.60@-145.579,-82.37 ccw(c-145.28,-82.071) J2.60@-145.28,-82.494 ; J2.60@-145.473,-82.724 cw(c-144.918,-83.278) -144.918,-82.494 ; J2.60@-145.473,-82.724 cw(c-144.918,-83.278) -144.918,-82.494 ; J2.60@-145.473,-82.724 cw(c-144.918,-83.278) -144.918,-82.494 ; J2.60@-145.473,-82.264 ccw(c-144.918,-81.709) -144.918,-82.494 ; J2.60@-145.473,-82.264 ccw(c-144.918,-81.709) -144.918,-82.494 ; J2.60@-145.473,-82.264 ccw(c-144.918,-81.709) -144.918,-82.494 ; J2.60@-145.529,-82.346 ccw(c-145.171,-81.988) -145.171,-82.494 cw(c-145.171,-81.988) J2.60@-145.529,-82.346 ; J2.60@-145.423,-82.699 cw(c-144.927,-83.195) -144.927,-82.494 ccw(c-144.927,-83.195) J2.60@-145.423,-82.699 ; J2.60@-145.423,-82.24 ccw(c-144.809,-81.625) -144.809,-82.494 cw(c-144.809,-81.625) J2.60@-145.423,-82.24
VD17: J2.59 LCD1.22 | length 146.8
  Top Layer w0.15: J2.59@-146.973,-82.494 -146.327,-81.848 ; J2.59@-146.973,-82.469 -146.328,-81.824 -140.624,-81.824 -135.8,-77 -132.6,-77 -129,-73.4 -123.1,-73.4 -113.2,-63.5 -113.2,-44.6 -111,-42.4 -102.8,-42.4 -101.9,-43.3 -65.7,-43.3 v1(-65.1,-43.9) ; v1@-65.225,-43.9 ccw(c-65.527,-43.9) -65.313,-43.687 ccw(c-65.1,-43.473) v1@-65.1,-43.775 ; v1@-65.188,-52.212 ccw(c-65.402,-51.998) -65.1,-51.998 ccw(c-64.798,-51.998) v1@-65.012,-52.212 ; v1(-65.1,-52.3) LCD1.22@-65.1,-49.7 ; J2.59@-146.973,-82.319 ccw(c-146.973,-81.896) J2.59@-146.674,-82.195 ; J2.59@-146.973,-82.319 ccw(c-146.973,-81.896) J2.59@-146.674,-82.195 ; J2.59@-146.973,-82.319 ccw(c-146.973,-81.896) J2.59@-146.674,-82.195 ; J2.59@-146.973,-82.169 ccw(c-146.973,-81.384) -146.418,-81.939 ; J2.59@-146.973,-82.169 ccw(c-146.973,-81.384) -146.418,-81.939 ; J2.59@-146.973,-82.169 ccw(c-146.973,-81.384) -146.418,-81.939 ; J2.59@-146.923,-82.144 ccw(c-146.923,-81.421) -146.411,-81.933 cw(c-146.923,-81.421) J2.59@-146.923,-82.144 ; J2.59@-146.923,-82.144 ccw(c-146.923,-81.48) -146.453,-81.95 cw(c-146.923,-81.48) J2.59@-146.923,-82.144 ; J2.59@-146.798,-82.494 cw(c-146.375,-82.494) J2.59@-146.674,-82.195 ; J2.59@-146.798,-82.494 cw(c-146.375,-82.494) J2.59@-146.674,-82.195 ; J2.59@-146.798,-82.494 cw(c-146.375,-82.494) J2.59@-146.674,-82.195 ; J2.59@-146.748,-82.469 cw(c-146.264,-82.469) -146.606,-82.127 ccw(c-146.264,-82.469) J2.59@-146.748,-82.469 ; J2.59@-146.748,-82.469 cw(c-146.205,-82.469) -146.589,-82.085 ccw(c-146.205,-82.469) J2.59@-146.748,-82.469 ; J2.59@-146.648,-82.494 cw(c-145.863,-82.494) -146.418,-81.939 ; J2.59@-146.648,-82.494 cw(c-145.863,-82.494) -146.418,-81.939 ; J2.59@-146.648,-82.494 cw(c-145.863,-82.494) -146.418,-81.939 ; J2.59@-146.598,-82.469 cw(c-145.752,-82.469) -146.35,-81.871 ccw(c-145.752,-82.469) J2.59@-146.598,-82.469 ; J2.59@-146.598,-82.469 cw(c-145.692,-82.469) -146.333,-81.829 ccw(c-145.692,-82.469) J2.59@-146.598,-82.469 ; -65.399,-43.601 cw(c-65.697,-43.9) v1@-65.275,-43.9 ; -65.399,-43.601 ccw(c-65.1,-43.303) v1@-65.1,-43.725 ; -65.399,-43.601 cw(c-65.697,-43.9) v1@-65.275,-43.9 ; -65.399,-43.601 ccw(c-65.1,-43.303) v1@-65.1,-43.725 ; -65.399,-43.601 cw(c-65.697,-43.9) v1@-65.275,-43.9 ; -65.399,-43.601 ccw(c-65.1,-43.303) v1@-65.1,-43.725 ; -65.399,-43.601 ccw(c-65.1,-43.303) v1@-65.1,-43.725 ; -65.399,-43.601 cw(c-65.697,-43.9) v1@-65.275,-43.9 ; v1@-65.224,-52.176 ccw(c-65.522,-51.878) -65.1,-51.878 ; v1@-65.224,-52.176 ccw(c-65.522,-51.878) -65.1,-51.878 ; v1@-65.224,-52.176 ccw(c-65.522,-51.878) -65.1,-51.878 ; v1@-65.224,-52.176 ccw(c-65.522,-51.878) -65.1,-51.878 ; -65.1,-51.878 ccw(c-64.678,-51.878) v1@-64.976,-52.176 ; -65.1,-51.878 ccw(c-64.678,-51.878) v1@-64.976,-52.176 ; -65.1,-51.878 ccw(c-64.678,-51.878) v1@-64.976,-52.176 ; -65.1,-51.878 ccw(c-64.678,-51.878) v1@-64.976,-52.176
  Bottom Layer w0.15: v1@-65.188,-52.212 ccw(c-65.402,-51.998) -65.1,-51.998 ccw(c-64.798,-51.998) v1@-65.012,-52.212 ; v1@-65.188,-43.988 cw(c-65.402,-44.202) -65.1,-44.202 cw(c-64.798,-44.202) v1@-65.012,-43.988 ; v1(-65.1,-52.3) v1(-65.1,-43.9) ; v1@-65.224,-52.176 ccw(c-65.522,-51.878) -65.1,-51.878 ; v1@-65.224,-52.176 ccw(c-65.522,-51.878) -65.1,-51.878 ; v1@-65.224,-52.176 ccw(c-65.522,-51.878) -65.1,-51.878 ; v1@-65.224,-52.176 ccw(c-65.522,-51.878) -65.1,-51.878 ; v1@-65.224,-44.024 cw(c-65.522,-44.322) -65.1,-44.322 ; v1@-65.224,-44.024 cw(c-65.522,-44.322) -65.1,-44.322 ; v1@-65.224,-44.024 cw(c-65.522,-44.322) -65.1,-44.322 ; v1@-65.224,-44.024 cw(c-65.522,-44.322) -65.1,-44.322 ; -65.1,-51.878 ccw(c-64.678,-51.878) v1@-64.976,-52.176 ; -65.1,-51.878 ccw(c-64.678,-51.878) v1@-64.976,-52.176 ; -65.1,-51.878 ccw(c-64.678,-51.878) v1@-64.976,-52.176 ; -65.1,-51.878 ccw(c-64.678,-51.878) v1@-64.976,-52.176 ; -65.1,-44.322 cw(c-64.678,-44.322) v1@-64.976,-44.024 ; -65.1,-44.322 cw(c-64.678,-44.322) v1@-64.976,-44.024 ; -65.1,-44.322 cw(c-64.678,-44.322) v1@-64.976,-44.024 ; -65.1,-44.322 cw(c-64.678,-44.322) v1@-64.976,-44.024
VD18: J2.62 LCD1.23 | length 121.7
  Top Layer w0.15: J2.62@-145.703,-83.765 -145.243,-83.765 -140.365,-83.765 -134.8,-78.2 -132,-78.2 -128.4,-74.6 -126.5,-74.6 -122.5,-74.6 -112,-64.1 -112,-45.3 -110.1,-43.4 -103.3,-43.4 -102.2,-44.5 -66.9,-44.5 -65.6,-45.8 LCD1.23@-65.6,-49.7 ; J2.62@-145.579,-83.889 cw(c-145.28,-84.187) J2.62@-145.28,-83.765 ; J2.62@-145.579,-83.889 cw(c-145.28,-84.187) J2.62@-145.28,-83.765 ; J2.62@-145.579,-83.889 cw(c-145.28,-84.187) J2.62@-145.28,-83.765 ; J2.62@-145.579,-83.641 ccw(c-145.28,-83.342) J2.62@-145.28,-83.765 ; J2.62@-145.579,-83.641 ccw(c-145.28,-83.342) J2.62@-145.28,-83.765 ; J2.62@-145.579,-83.641 ccw(c-145.28,-83.342) J2.62@-145.28,-83.765 ; J2.62@-145.473,-83.995 cw(c-144.918,-84.549) -144.918,-83.765 ; J2.62@-145.473,-83.995 cw(c-144.918,-84.549) -144.918,-83.765 ; J2.62@-145.473,-83.995 cw(c-144.918,-84.549) -144.918,-83.765 ; J2.62@-145.473,-83.535 ccw(c-144.918,-82.98) -144.918,-83.765 ; J2.62@-145.473,-83.535 ccw(c-144.918,-82.98) -144.918,-83.765 ; J2.62@-145.473,-83.535 ccw(c-144.918,-82.98) -144.918,-83.765 ; J2.62@-145.529,-83.616 ccw(c-145.169,-83.255) -145.169,-83.765 cw(c-145.169,-83.255) J2.62@-145.529,-83.616 ; J2.62@-145.423,-83.969 cw(c-144.93,-84.463) -144.93,-83.765 ccw(c-144.93,-84.463) J2.62@-145.423,-83.969 ; J2.62@-145.423,-83.51 ccw(c-144.807,-82.893) -144.807,-83.765 cw(c-144.807,-82.893) J2.62@-145.423,-83.51
VD19: J2.61 LCD1.24 | length 145.3
  Top Layer w0.15: J2.61@-146.973,-83.765 -146.348,-83.14 ; J2.61@-146.973,-83.739 -146.333,-83.1 ; -140.44,-83.1 -146.333,-83.1 ; -140.4,-83.1 -135.1,-77.8 -132.2,-77.8 -128.6,-74.2 -122.7,-74.2 -112.4,-63.9 -112.4,-45.1 -110.4,-43.1 -103.1,-43.1 -102.1,-44.1 -66.5,-44.1 v1(-66.1,-44.5) ; v1@-66.225,-44.5 ccw(c-66.527,-44.5) -66.313,-44.287 ccw(c-66.1,-44.073) v1@-66.1,-44.375 ; v1@-66.188,-52.212 ccw(c-66.402,-51.998) -66.1,-51.998 ccw(c-65.798,-51.998) v1@-66.012,-52.212 ; v1(-66.1,-52.3) LCD1.24@-66.1,-49.7 ; J2.61@-146.973,-83.59 ccw(c-146.973,-83.167) J2.61@-146.674,-83.466 ; J2.61@-146.973,-83.59 ccw(c-146.973,-83.167) J2.61@-146.674,-83.466 ; J2.61@-146.973,-83.59 ccw(c-146.973,-83.167) J2.61@-146.674,-83.466 ; J2.61@-146.973,-83.44 ccw(c-146.973,-82.655) -146.418,-83.21 ; J2.61@-146.973,-83.44 ccw(c-146.973,-82.655) -146.418,-83.21 ; J2.61@-146.973,-83.44 ccw(c-146.973,-82.655) -146.418,-83.21 ; J2.61@-146.923,-83.414 ccw(c-146.923,-82.689) -146.41,-83.202 cw(c-146.923,-82.689) J2.61@-146.923,-83.414 ; J2.61@-146.923,-83.414 ccw(c-146.923,-82.75) -146.453,-83.22 cw(c-146.923,-82.75) J2.61@-146.923,-83.414 ; J2.61@-146.798,-83.765 cw(c-146.375,-83.765) J2.61@-146.674,-83.466 ; J2.61@-146.798,-83.765 cw(c-146.375,-83.765) J2.61@-146.674,-83.466 ; J2.61@-146.798,-83.765 cw(c-146.375,-83.765) J2.61@-146.674,-83.466 ; J2.61@-146.748,-83.739 cw(c-146.266,-83.739) -146.607,-83.399 ccw(c-146.266,-83.739) J2.61@-146.748,-83.739 ; J2.61@-146.748,-83.739 cw(c-146.206,-83.739) -146.589,-83.356 ccw(c-146.206,-83.739) J2.61@-146.748,-83.739 ; J2.61@-146.648,-83.765 cw(c-145.863,-83.765) -146.418,-83.21 ; J2.61@-146.648,-83.765 cw(c-145.863,-83.765) -146.418,-83.21 ; J2.61@-146.648,-83.765 cw(c-145.863,-83.765) -146.418,-83.21 ; J2.61@-146.598,-83.739 cw(c-145.754,-83.739) -146.351,-83.143 ccw(c-145.754,-83.739) J2.61@-146.598,-83.739 ; J2.61@-146.598,-83.739 cw(c-145.695,-83.738) -146.334,-83.1 ; J2.61@-146.598,-83.739 cw(c-145.695,-83.738) -146.334,-83.1 ; -66.399,-44.201 cw(c-66.697,-44.5) v1@-66.275,-44.5 ; -66.399,-44.201 ccw(c-66.1,-43.903) v1@-66.1,-44.325 ; -66.399,-44.201 cw(c-66.697,-44.5) v1@-66.275,-44.5 ; -66.399,-44.201 ccw(c-66.1,-43.903) v1@-66.1,-44.325 ; -66.399,-44.201 cw(c-66.697,-44.5) v1@-66.275,-44.5 ; -66.399,-44.201 ccw(c-66.1,-43.903) v1@-66.1,-44.325 ; -66.399,-44.201 ccw(c-66.1,-43.903) v1@-66.1,-44.325 ; -66.399,-44.201 cw(c-66.697,-44.5) v1@-66.275,-44.5 ; v1@-66.224,-52.176 ccw(c-66.522,-51.878) -66.1,-51.878 ; v1@-66.224,-52.176 ccw(c-66.522,-51.878) -66.1,-51.878 ; v1@-66.224,-52.176 ccw(c-66.522,-51.878) -66.1,-51.878 ; v1@-66.224,-52.176 ccw(c-66.522,-51.878) -66.1,-51.878 ; -66.1,-51.878 ccw(c-65.678,-51.878) v1@-65.976,-52.176 ; -66.1,-51.878 ccw(c-65.678,-51.878) v1@-65.976,-52.176 ; -66.1,-51.878 ccw(c-65.678,-51.878) v1@-65.976,-52.176 ; -66.1,-51.878 ccw(c-65.678,-51.878) v1@-65.976,-52.176
  Bottom Layer w0.15: v1@-66.188,-52.212 ccw(c-66.402,-51.998) -66.1,-51.998 ccw(c-65.798,-51.998) v1@-66.012,-52.212 ; v1@-66.188,-44.588 cw(c-66.402,-44.802) -66.1,-44.802 cw(c-65.798,-44.802) v1@-66.012,-44.588 ; v1(-66.1,-52.3) v1(-66.1,-44.5) ; v1@-66.224,-52.176 ccw(c-66.522,-51.878) -66.1,-51.878 ; v1@-66.224,-52.176 ccw(c-66.522,-51.878) -66.1,-51.878 ; v1@-66.224,-52.176 ccw(c-66.522,-51.878) -66.1,-51.878 ; v1@-66.224,-52.176 ccw(c-66.522,-51.878) -66.1,-51.878 ; v1@-66.224,-44.624 cw(c-66.522,-44.922) -66.1,-44.922 ; v1@-66.224,-44.624 cw(c-66.522,-44.922) -66.1,-44.922 ; v1@-66.224,-44.624 cw(c-66.522,-44.922) -66.1,-44.922 ; v1@-66.224,-44.624 cw(c-66.522,-44.922) -66.1,-44.922 ; -66.1,-51.878 ccw(c-65.678,-51.878) v1@-65.976,-52.176 ; -66.1,-51.878 ccw(c-65.678,-51.878) v1@-65.976,-52.176 ; -66.1,-51.878 ccw(c-65.678,-51.878) v1@-65.976,-52.176 ; -66.1,-51.878 ccw(c-65.678,-51.878) v1@-65.976,-52.176 ; -66.1,-44.922 cw(c-65.678,-44.922) v1@-65.976,-44.624 ; -66.1,-44.922 cw(c-65.678,-44.922) v1@-65.976,-44.624 ; -66.1,-44.922 cw(c-65.678,-44.922) v1@-65.976,-44.624 ; -66.1,-44.922 cw(c-65.678,-44.922) v1@-65.976,-44.624
VD20: J2.64 LCD1.25 | length 120.2
  Top Layer w0.15: J2.64@-145.703,-85.036 -140.136,-85.036 -134.1,-79 -131.6,-79 -127.953,-75.353 -122.053,-75.353 -111.2,-64.5 -111.2,-45.7 -109.5,-44 -103.7,-44 -102.4,-45.3 -67.9,-45.3 -66.6,-46.6 LCD1.25@-66.6,-49.7 ; J2.64@-145.579,-85.159 cw(c-145.28,-85.458) J2.64@-145.28,-85.036 ; J2.64@-145.579,-85.159 cw(c-145.28,-85.458) J2.64@-145.28,-85.036 ; J2.64@-145.579,-85.159 cw(c-145.28,-85.458) J2.64@-145.28,-85.036 ; J2.64@-145.579,-84.912 ccw(c-145.28,-84.613) J2.64@-145.28,-85.036 ; J2.64@-145.579,-84.912 ccw(c-145.28,-84.613) J2.64@-145.28,-85.036 ; J2.64@-145.579,-84.912 ccw(c-145.28,-84.613) J2.64@-145.28,-85.036 ; J2.64@-145.473,-85.265 cw(c-144.918,-85.82) -144.918,-85.036 ; J2.64@-145.473,-85.265 cw(c-144.918,-85.82) -144.918,-85.036 ; J2.64@-145.473,-85.265 cw(c-144.918,-85.82) -144.918,-85.036 ; J2.64@-145.473,-84.806 ccw(c-144.918,-84.251) -144.918,-85.036 ; J2.64@-145.473,-84.806 ccw(c-144.918,-84.251) -144.918,-85.036 ; J2.64@-145.473,-84.806 ccw(c-144.918,-84.251) -144.918,-85.036 ; J2.64@-145.529,-84.886 ccw(c-145.167,-84.523) -145.167,-85.036 cw(c-145.167,-84.523) J2.64@-145.529,-84.886 ; J2.64@-145.423,-85.239 cw(c-144.932,-85.73) -144.932,-85.036 ccw(c-144.932,-85.73) J2.64@-145.423,-85.239 ; J2.64@-145.423,-84.78 ccw(c-144.805,-84.161) -144.805,-85.036 cw(c-144.805,-84.161) J2.64@-145.423,-84.78
VD21: J2.63 LCD1.26 | length 140.7
  Top Layer w0.15: J2.63@-146.973,-85.036 -146.337,-84.4 ; J2.63@-146.973,-85.009 -146.348,-84.384 ; v1@-67.188,-52.212 ccw(c-67.402,-51.998) -67.1,-51.998 ccw(c-66.798,-51.998) v1@-67.012,-52.212 ; v1(-67.1,-52.3) LCD1.26@-67.1,-49.7 ; v1(-67.1,-45.2) -67.4,-44.9 -102.3,-44.9 -103.5,-43.7 -109.8,-43.7 -111.6,-45.5 -111.6,-64.3 -122.3,-75 -128.2,-75 -131.8,-78.6 -134.5,-78.6 -140.284,-84.384 -146.348,-84.384 ; J2.63@-146.973,-84.861 ccw(c-146.973,-84.438) J2.63@-146.674,-84.737 ; J2.63@-146.973,-84.861 ccw(c-146.973,-84.438) J2.63@-146.674,-84.737 ; J2.63@-146.973,-84.861 ccw(c-146.973,-84.438) J2.63@-146.674,-84.737 ; J2.63@-146.973,-84.711 ccw(c-146.973,-83.926) -146.418,-84.481 ; J2.63@-146.973,-84.711 ccw(c-146.973,-83.926) -146.418,-84.481 ; J2.63@-146.973,-84.711 ccw(c-146.973,-83.926) -146.418,-84.481 ; J2.63@-146.923,-84.684 ccw(c-146.923,-83.957) -146.408,-84.471 cw(c-146.923,-83.957) J2.63@-146.923,-84.684 ; J2.63@-146.923,-84.684 ccw(c-146.923,-84.02) -146.453,-84.49 cw(c-146.923,-84.02) J2.63@-146.923,-84.684 ; J2.63@-146.798,-85.036 cw(c-146.375,-85.036) J2.63@-146.674,-84.737 ; J2.63@-146.798,-85.036 cw(c-146.375,-85.036) J2.63@-146.674,-84.737 ; J2.63@-146.798,-85.036 cw(c-146.375,-85.036) J2.63@-146.674,-84.737 ; J2.63@-146.648,-85.036 cw(c-145.863,-85.036) -146.418,-84.481 ; J2.63@-146.648,-85.036 cw(c-145.863,-85.036) -146.418,-84.481 ; J2.63@-146.648,-85.036 cw(c-145.863,-85.036) -146.418,-84.481 ; -146.348,-84.384 ccw(c-145.744,-84.988) -146.598,-85.004 cw(c-145.744,-84.988) -146.348,-84.384 ; v1@-67.224,-52.176 ccw(c-67.522,-51.878) -67.1,-51.878 ; v1@-67.224,-52.176 ccw(c-67.522,-51.878) -67.1,-51.878 ; v1@-67.224,-52.176 ccw(c-67.522,-51.878) -67.1,-51.878 ; v1@-67.224,-52.176 ccw(c-67.522,-51.878) -67.1,-51.878 ; -67.1,-51.878 ccw(c-66.678,-51.878) v1@-66.976,-52.176 ; -67.1,-51.878 ccw(c-66.678,-51.878) v1@-66.976,-52.176 ; -67.1,-51.878 ccw(c-66.678,-51.878) v1@-66.976,-52.176 ; -67.1,-51.878 ccw(c-66.678,-51.878) v1@-66.976,-52.176 ; J2.63@-146.748,-85.009 cw(c-146.268,-85.009) -146.607,-84.67 ccw(c-146.268,-85.009) J2.63@-146.748,-85.009 ; J2.63@-146.748,-85.006 cw(c-146.235,-84.997) -146.598,-84.634 ccw(c-146.235,-84.997) J2.63@-146.748,-85.006 ; J2.63@-146.598,-85.009 cw(c-145.756,-85.009) -146.351,-84.414 ccw(c-145.756,-85.009) J2.63@-146.598,-85.009
  Bottom Layer w0.15: v1@-67.188,-52.212 ccw(c-67.402,-51.998) -67.1,-51.998 ccw(c-66.798,-51.998) v1@-67.012,-52.212 ; v1@-67.188,-45.288 cw(c-67.402,-45.502) -67.1,-45.502 cw(c-66.798,-45.502) v1@-67.012,-45.288 ; v1(-67.1,-52.3) v1(-67.1,-45.2) ; v1@-67.224,-52.176 ccw(c-67.522,-51.878) -67.1,-51.878 ; v1@-67.224,-52.176 ccw(c-67.522,-51.878) -67.1,-51.878 ; v1@-67.224,-52.176 ccw(c-67.522,-51.878) -67.1,-51.878 ; v1@-67.224,-52.176 ccw(c-67.522,-51.878) -67.1,-51.878 ; v1@-67.224,-45.324 cw(c-67.522,-45.622) -67.1,-45.622 ; v1@-67.224,-45.324 cw(c-67.522,-45.622) -67.1,-45.622 ; v1@-67.224,-45.324 cw(c-67.522,-45.622) -67.1,-45.622 ; v1@-67.224,-45.324 cw(c-67.522,-45.622) -67.1,-45.622 ; -67.1,-51.878 ccw(c-66.678,-51.878) v1@-66.976,-52.176 ; -67.1,-51.878 ccw(c-66.678,-51.878) v1@-66.976,-52.176 ; -67.1,-51.878 ccw(c-66.678,-51.878) v1@-66.976,-52.176 ; -67.1,-51.878 ccw(c-66.678,-51.878) v1@-66.976,-52.176 ; -67.1,-45.622 cw(c-66.678,-45.622) v1@-66.976,-45.324 ; -67.1,-45.622 cw(c-66.678,-45.622) v1@-66.976,-45.324 ; -67.1,-45.622 cw(c-66.678,-45.622) v1@-66.976,-45.324 ; -67.1,-45.622 cw(c-66.678,-45.622) v1@-66.976,-45.324
VD22: J2.66 LCD1.27 | length 118.8
  Top Layer w0.15: J2.66@-145.703,-86.307 -139.907,-86.307 -133.4,-79.8 -131.2,-79.8 -127.5,-76.1 -121.7,-76.1 -110.4,-64.8 -110.4,-46.1 -108.9,-44.6 -104.2,-44.6 -102.665,-46.135 -68.765,-46.135 -67.6,-47.3 LCD1.27@-67.6,-49.7 ; J2.66@-145.579,-86.43 cw(c-145.28,-86.729) J2.66@-145.28,-86.307 ; J2.66@-145.579,-86.43 cw(c-145.28,-86.729) J2.66@-145.28,-86.307 ; J2.66@-145.579,-86.43 cw(c-145.28,-86.729) J2.66@-145.28,-86.307 ; J2.66@-145.579,-86.183 ccw(c-145.28,-85.884) J2.66@-145.28,-86.307 ; J2.66@-145.579,-86.183 ccw(c-145.28,-85.884) J2.66@-145.28,-86.307 ; J2.66@-145.579,-86.183 ccw(c-145.28,-85.884) J2.66@-145.28,-86.307 ; J2.66@-145.473,-86.536 cw(c-144.918,-87.091) -144.918,-86.307 ; J2.66@-145.473,-86.536 cw(c-144.918,-87.091) -144.918,-86.307 ; J2.66@-145.473,-86.536 cw(c-144.918,-87.091) -144.918,-86.307 ; J2.66@-145.473,-86.077 ccw(c-144.918,-85.522) -144.918,-86.307 ; J2.66@-145.473,-86.077 ccw(c-144.918,-85.522) -144.918,-86.307 ; J2.66@-145.473,-86.077 ccw(c-144.918,-85.522) -144.918,-86.307 ; J2.66@-145.529,-86.156 ccw(c-145.165,-85.791) -145.165,-86.307 cw(c-145.165,-85.791) J2.66@-145.529,-86.156 ; J2.66@-145.423,-86.509 cw(c-144.934,-86.998) -144.934,-86.307 ccw(c-144.934,-86.998) J2.66@-145.423,-86.509 ; J2.66@-145.423,-86.05 ccw(c-144.803,-85.429) -144.803,-86.307 cw(c-144.803,-85.429) J2.66@-145.423,-86.05
VD23: J2.65 LCD1.28 | length 142.4
  Top Layer w0.15: J2.65@-146.973,-86.307 -146.348,-85.682 ; J2.65@-146.973,-86.279 -146.348,-85.654 ; v1@-68.225,-46.1 ccw(c-68.527,-46.1) -68.313,-45.887 ccw(c-68.1,-45.673) v1@-68.1,-45.975 ; v1@-68.188,-52.212 ccw(c-68.402,-51.998) -68.1,-51.998 ccw(c-67.798,-51.998) v1@-68.012,-52.212 ; v1(-68.1,-52.3) LCD1.28@-68.1,-49.7 ; v1(-68.1,-46.1) -68.5,-45.7 -102.5,-45.7 -103.9,-44.3 -109.2,-44.3 -110.8,-45.9 -110.8,-64.7 -121.8,-75.7 -127.7,-75.7 -131.4,-79.4 -133.7,-79.4 -139.954,-85.654 -146.348,-85.654 ; J2.65@-146.973,-86.132 ccw(c-146.973,-85.709) J2.65@-146.674,-86.008 ; J2.65@-146.973,-86.132 ccw(c-146.973,-85.709) J2.65@-146.674,-86.008 ; J2.65@-146.973,-86.132 ccw(c-146.973,-85.709) J2.65@-146.674,-86.008 ; J2.65@-146.973,-85.982 ccw(c-146.973,-85.197) -146.418,-85.752 ; J2.65@-146.973,-85.982 ccw(c-146.973,-85.197) -146.418,-85.752 ; J2.65@-146.973,-85.982 ccw(c-146.973,-85.197) -146.418,-85.752 ; J2.65@-146.923,-85.954 ccw(c-146.923,-85.225) -146.407,-85.741 cw(c-146.923,-85.225) J2.65@-146.923,-85.954 ; J2.65@-146.923,-85.954 ccw(c-146.923,-85.29) -146.453,-85.76 cw(c-146.923,-85.29) J2.65@-146.923,-85.954 ; J2.65@-146.798,-86.307 cw(c-146.375,-86.307) J2.65@-146.674,-86.008 ; J2.65@-146.798,-86.307 cw(c-146.375,-86.307) J2.65@-146.674,-86.008 ; J2.65@-146.798,-86.307 cw(c-146.375,-86.307) J2.65@-146.674,-86.008 ; J2.65@-146.648,-86.307 cw(c-145.863,-86.307) -146.418,-85.752 ; J2.65@-146.648,-86.307 cw(c-145.863,-86.307) -146.418,-85.752 ; J2.65@-146.648,-86.307 cw(c-145.863,-86.307) -146.418,-85.752 ; -146.348,-85.654 ccw(c-145.744,-86.258) -146.598,-86.274 cw(c-145.744,-86.258) -146.348,-85.654 ; -68.399,-45.801 cw(c-68.697,-46.1) v1@-68.275,-46.1 ; -68.399,-45.801 ccw(c-68.1,-45.503) v1@-68.1,-45.925 ; -68.399,-45.801 cw(c-68.697,-46.1) v1@-68.275,-46.1 ; -68.399,-45.801 ccw(c-68.1,-45.503) v1@-68.1,-45.925 ; -68.399,-45.801 cw(c-68.697,-46.1) v1@-68.275,-46.1 ; -68.399,-45.801 ccw(c-68.1,-45.503) v1@-68.1,-45.925 ; -68.399,-45.801 ccw(c-68.1,-45.503) v1@-68.1,-45.925 ; -68.399,-45.801 cw(c-68.697,-46.1) v1@-68.275,-46.1 ; v1@-68.224,-52.176 ccw(c-68.522,-51.878) -68.1,-51.878 ; v1@-68.224,-52.176 ccw(c-68.522,-51.878) -68.1,-51.878 ; v1@-68.224,-52.176 ccw(c-68.522,-51.878) -68.1,-51.878 ; v1@-68.224,-52.176 ccw(c-68.522,-51.878) -68.1,-51.878 ; -68.1,-51.878 ccw(c-67.678,-51.878) v1@-67.976,-52.176 ; -68.1,-51.878 ccw(c-67.678,-51.878) v1@-67.976,-52.176 ; -68.1,-51.878 ccw(c-67.678,-51.878) v1@-67.976,-52.176 ; -68.1,-51.878 ccw(c-67.678,-51.878) v1@-67.976,-52.176 ; J2.65@-146.748,-86.279 cw(c-146.27,-86.279) -146.608,-85.942 ccw(c-146.27,-86.279) J2.65@-146.748,-86.279 ; J2.65@-146.748,-86.276 cw(c-146.235,-86.267) -146.598,-85.904 ccw(c-146.235,-86.267) J2.65@-146.748,-86.276 ; J2.65@-146.598,-86.279 cw(c-145.758,-86.279) -146.352,-85.686 ccw(c-145.758,-86.279) J2.65@-146.598,-86.279
  Bottom Layer w0.15: v1@-68.188,-52.212 ccw(c-68.402,-51.998) -68.1,-51.998 ccw(c-67.798,-51.998) v1@-68.012,-52.212 ; v1@-68.188,-46.188 cw(c-68.402,-46.402) -68.1,-46.402 cw(c-67.798,-46.402) v1@-68.012,-46.188 ; v1(-68.1,-52.3) v1(-68.1,-46.1) ; v1@-68.224,-52.176 ccw(c-68.522,-51.878) -68.1,-51.878 ; v1@-68.224,-52.176 ccw(c-68.522,-51.878) -68.1,-51.878 ; v1@-68.224,-52.176 ccw(c-68.522,-51.878) -68.1,-51.878 ; v1@-68.224,-52.176 ccw(c-68.522,-51.878) -68.1,-51.878 ; v1@-68.224,-46.224 cw(c-68.522,-46.522) -68.1,-46.522 ; v1@-68.224,-46.224 cw(c-68.522,-46.522) -68.1,-46.522 ; v1@-68.224,-46.224 cw(c-68.522,-46.522) -68.1,-46.522 ; v1@-68.224,-46.224 cw(c-68.522,-46.522) -68.1,-46.522 ; -68.1,-51.878 ccw(c-67.678,-51.878) v1@-67.976,-52.176 ; -68.1,-51.878 ccw(c-67.678,-51.878) v1@-67.976,-52.176 ; -68.1,-51.878 ccw(c-67.678,-51.878) v1@-67.976,-52.176 ; -68.1,-51.878 ccw(c-67.678,-51.878) v1@-67.976,-52.176 ; -68.1,-46.522 cw(c-67.678,-46.522) v1@-67.976,-46.224 ; -68.1,-46.522 cw(c-67.678,-46.522) v1@-67.976,-46.224 ; -68.1,-46.522 cw(c-67.678,-46.522) v1@-67.976,-46.224 ; -68.1,-46.522 cw(c-67.678,-46.522) v1@-67.976,-46.224